# Altium PCB A3010_Adelaide_Keyboard.pcbdoc
Units mm, origin at the board's own origin, x right, y up, seen from the top; angles counter-clockwise.
Board outline 57.91 x 84.45 mm, 4 copper layers (TopLayer, GND, VCC, BottomLayer), stack 1.659 mm thick; 35 components, 70 nets, 249 pads, 0 vias.
Unrouted connection lines stored in the file: 103.
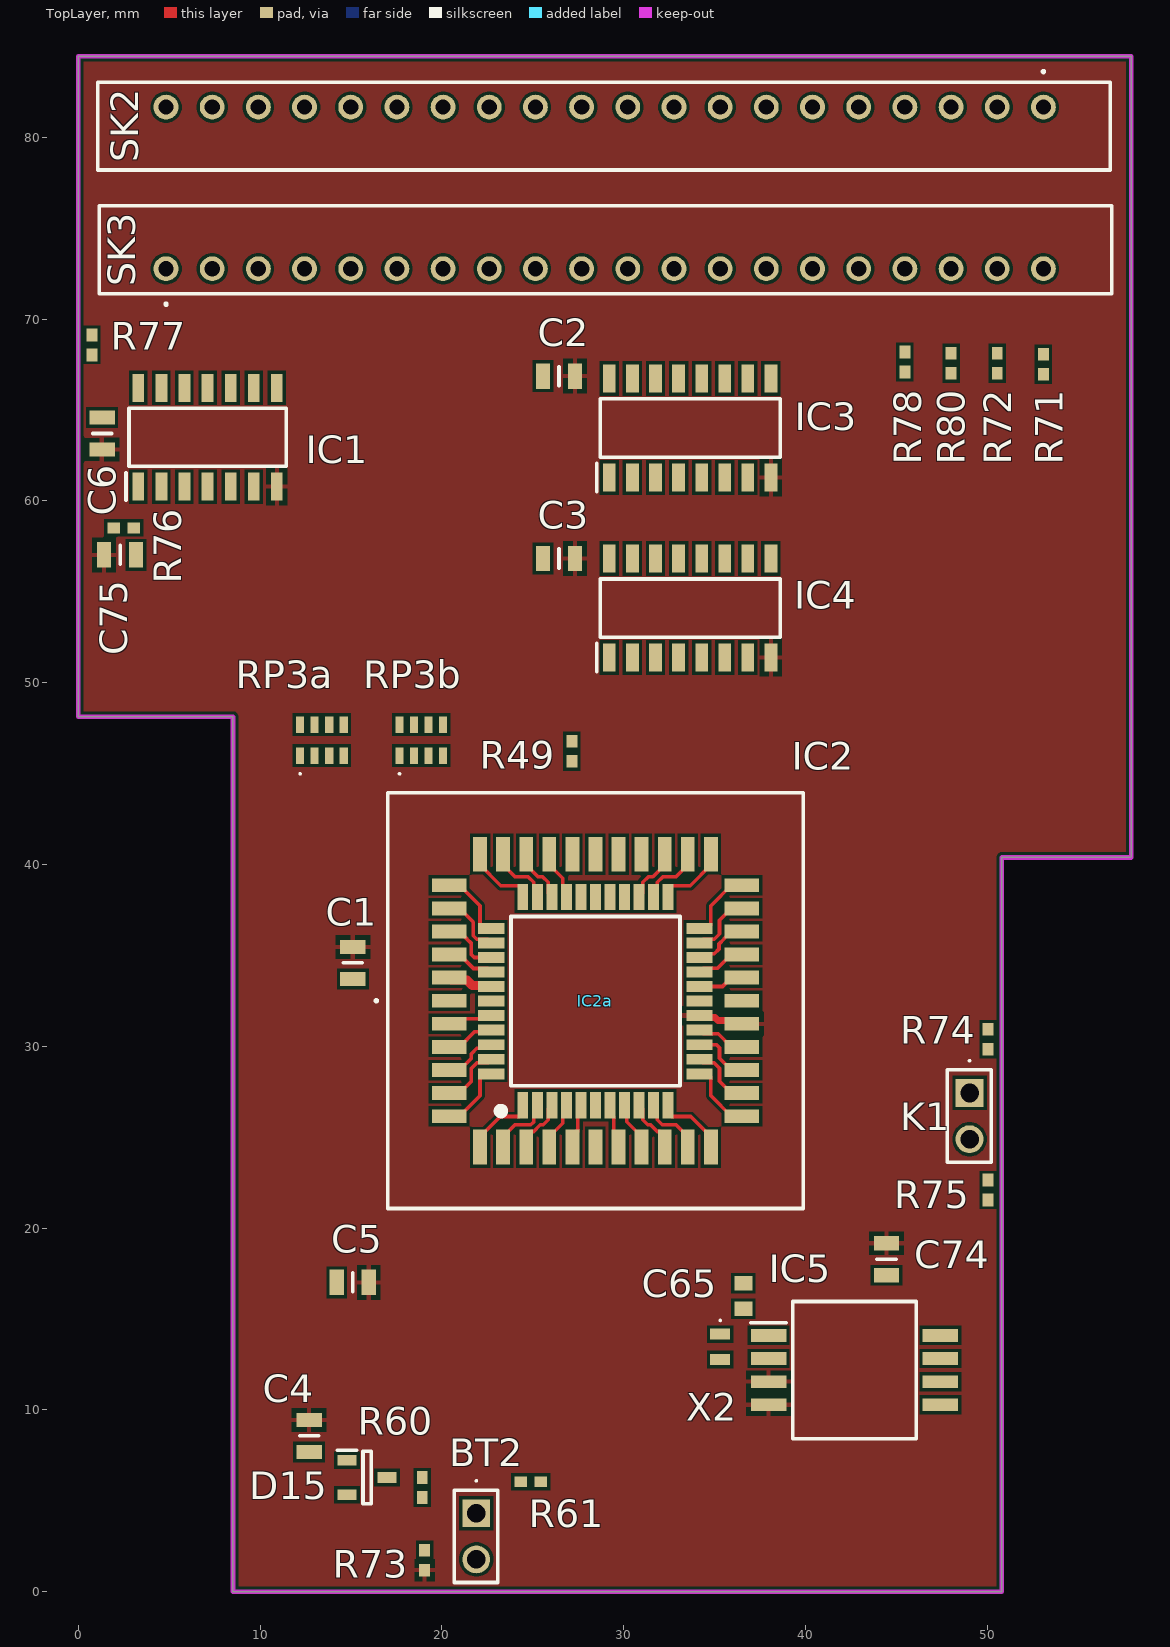
[diagram p0: TopLayer view]
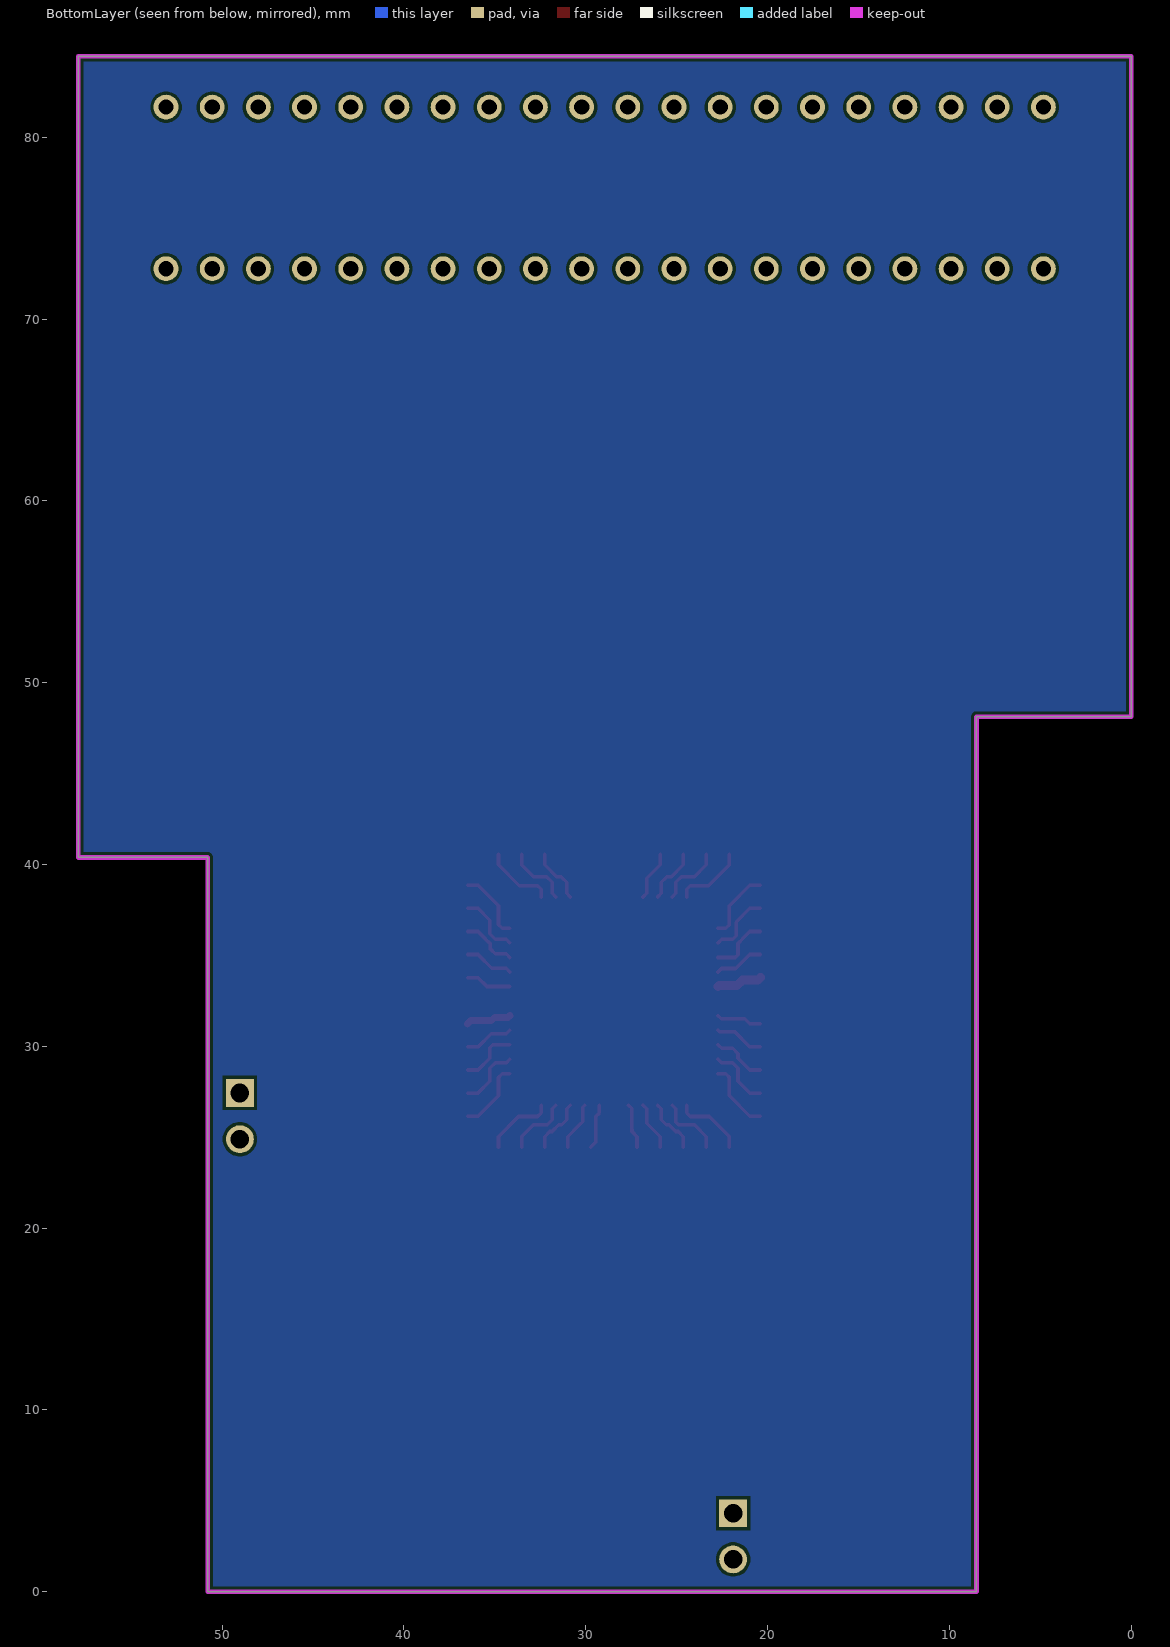
[diagram p1: BottomLayer view, seen from below]
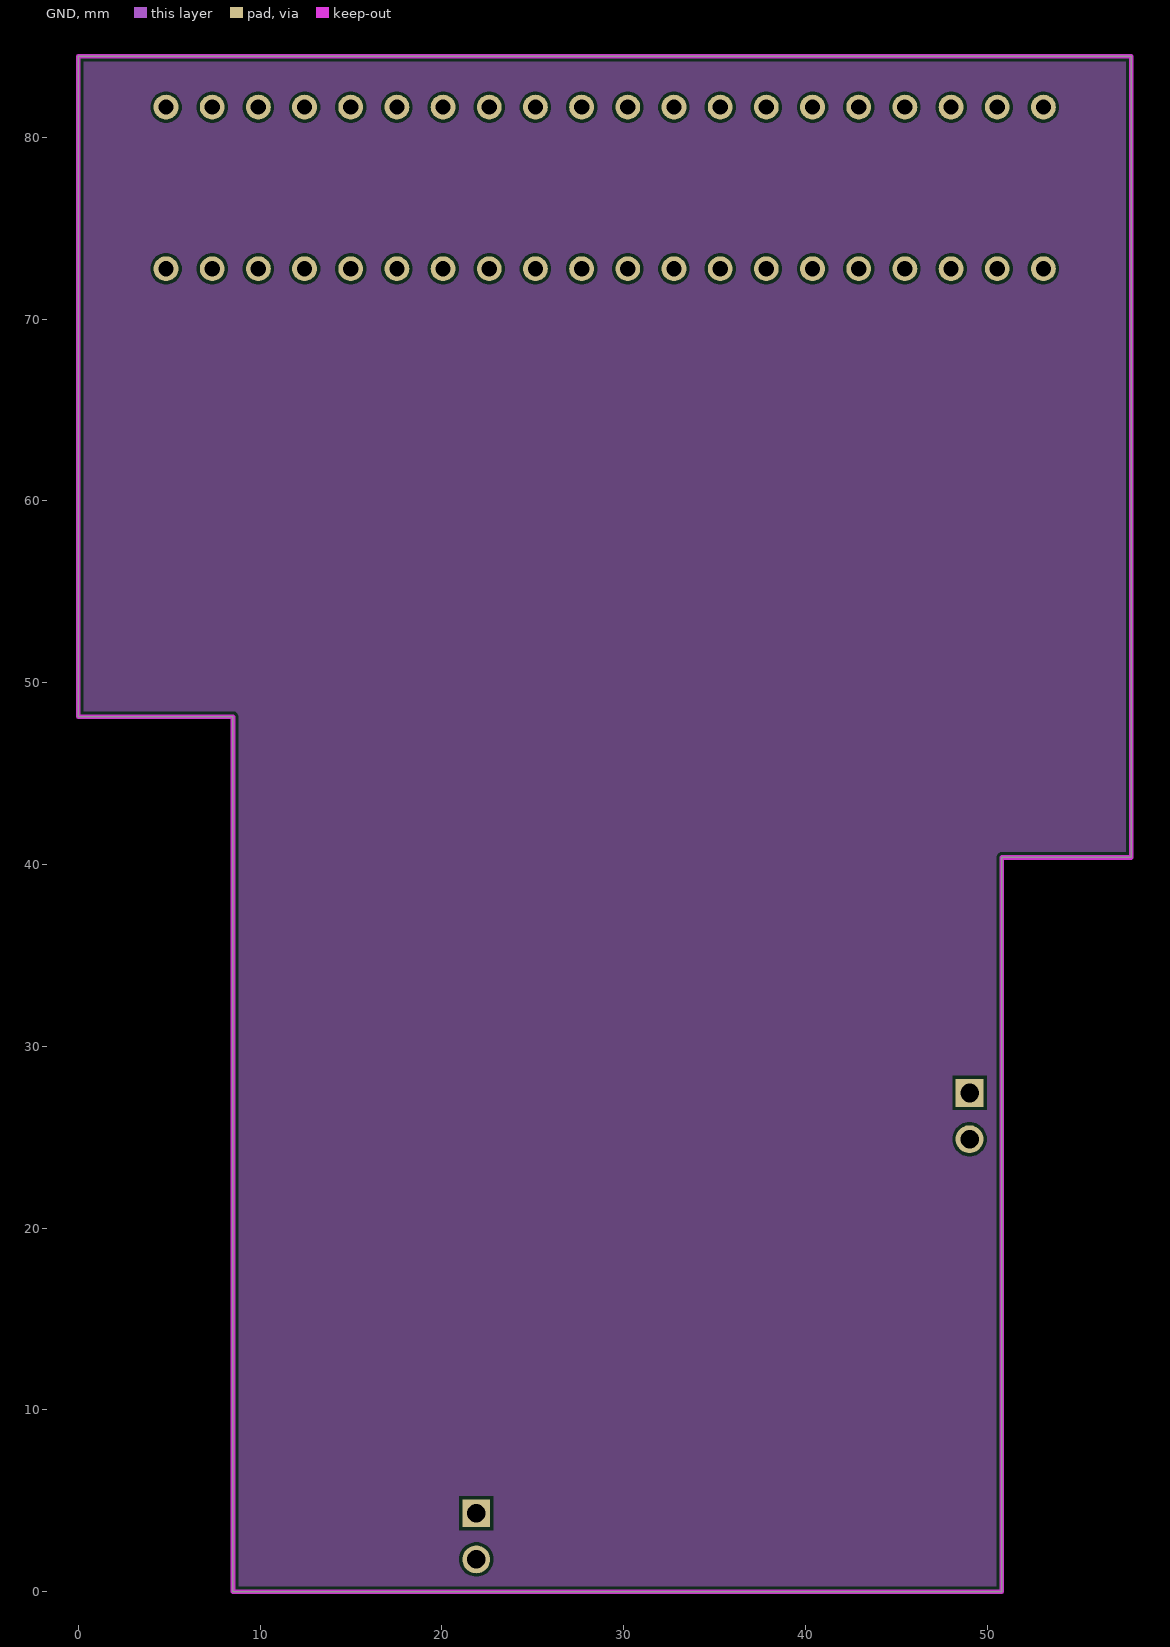
[diagram p2: GND]
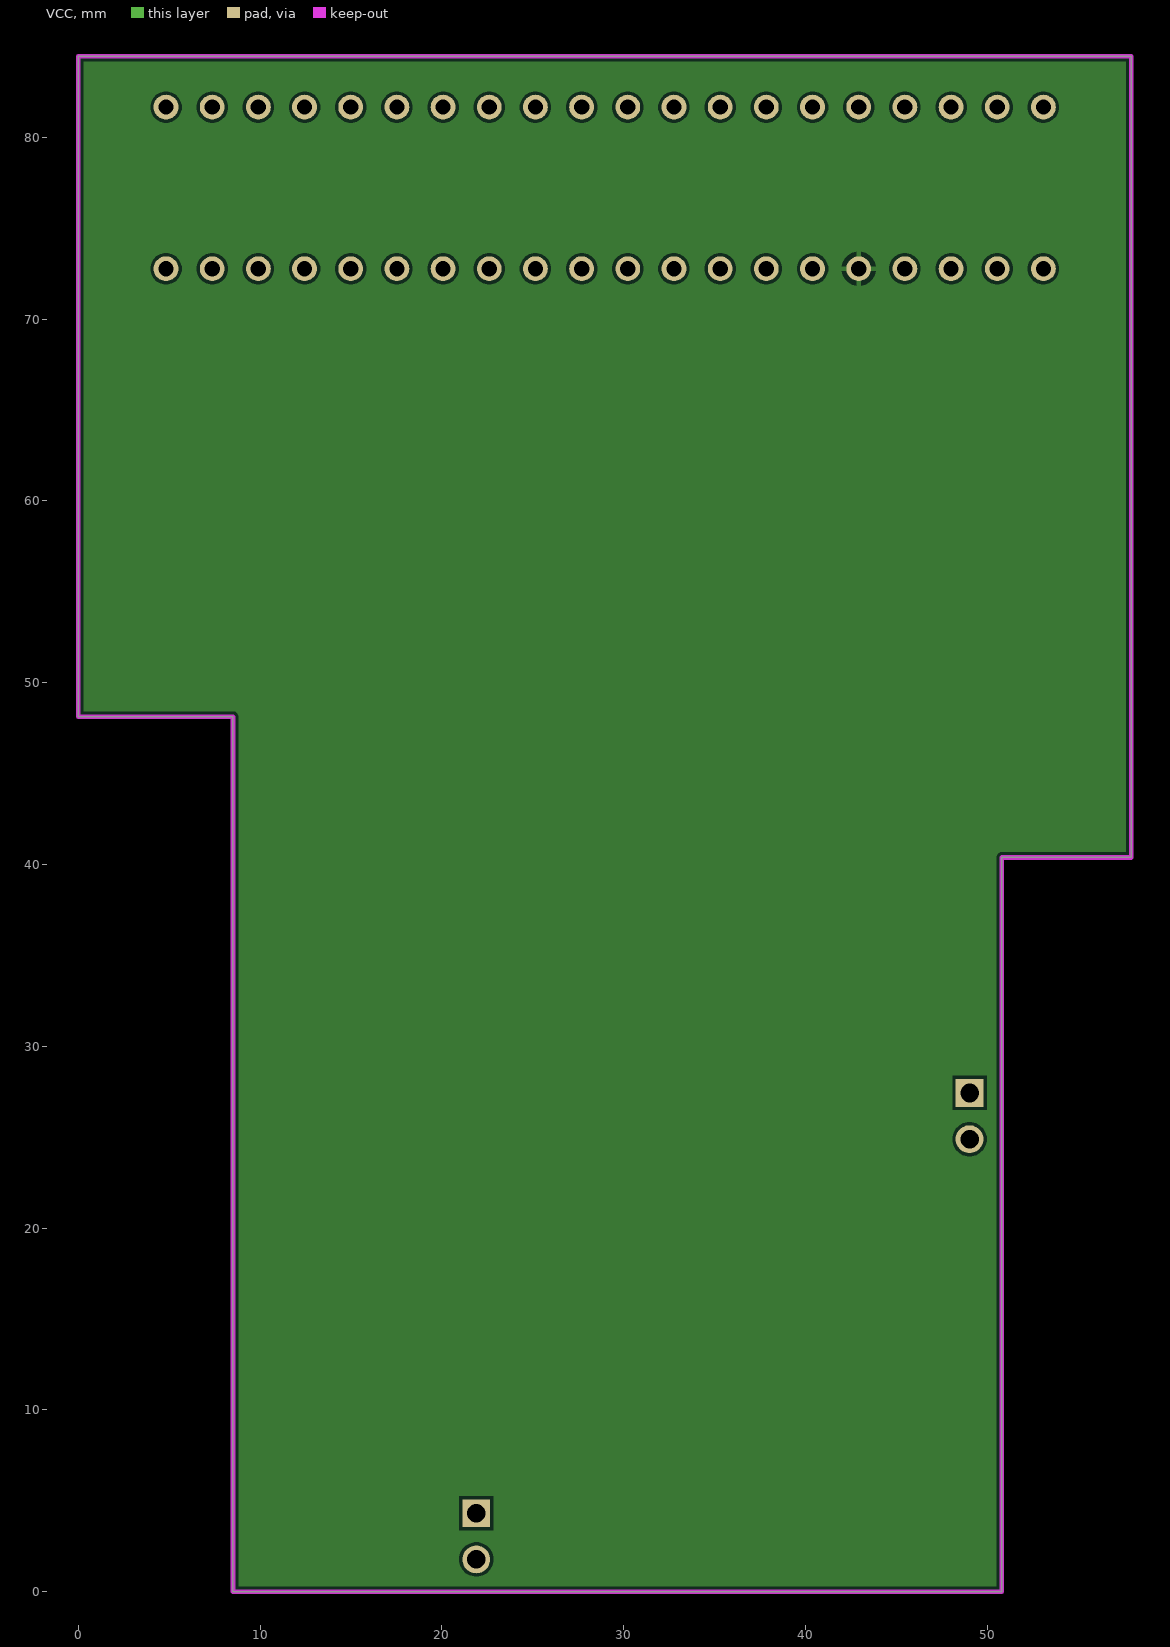
[diagram p3: VCC]

## Layer stack, top to bottom
TopSolder: solder mask 0.01, Solder Resist, Dk 3.5
TopLayer: signal copper 0.036
Dielectric 1: prepreg 0.2083, PP-022, Dk 4.5
GND: signal copper 0.035
Dielectric 2: core 1.1, Core-043, Dk 4.3
VCC: signal copper 0.035
Dielectric 3: prepreg 0.2083, PP-022, Dk 4.5
BottomLayer: signal copper 0.036
BottomSolder: solder mask 0.01, Solder Resist, Dk 3.5

## Board outline
50.8,0 8.509,0 8.509,48.133 0,48.133 0,84.455 57.912,84.455 57.912,40.386 50.8,40.386

## Design rules (kind name [scope] priority, off if disabled: settings)
BoardOutlineClearance [All] p1: gap=0.3 ignorepadtopadclearanceinfootprint=FALSE
Clearance [All] p1: gap=0.17 ignorepadtopadclearanceinfootprint=FALSE except(0.3: Via-Via; 0.5: Via-Hole)
ComponentClearance ComponentClearance_Z2_Z3 [(InComponent('Z2') OR InComponent('Z3')) vs InComponent('No Component')] p1: gap=0 collisioncheckmode=3 verticalgap=0 showdistances=FALSE
ComponentClearance ComponentClearance_U4_J104 [All] p2: gap=0 collisioncheckmode=3 verticalgap=0 showdistances=FALSE
ComponentClearance ComponentClearance_J3_J4 [InComponent('J3') vs InComponent('J4')] p3: gap=0 collisioncheckmode=3 verticalgap=0 showdistances=FALSE
ComponentClearance ComponentClearance_J103_J104 [InComponent('J103') vs InComponent('J104')] p4: gap=0 collisioncheckmode=3 verticalgap=0 showdistances=FALSE
ComponentClearance [All] p5: gap=0.254 collisioncheckmode=3 verticalgap=0.254 showdistances=FALSE
DiffPairsRouting [InDifferentialPairClass('All Differential Pairs')] p1: maxlimit=0.254 minlimit=0.114 mostfreqgap=0.17 toplayer_mingap=0.17 toplayer_minwidth=0.2 toplayer_maxwidth=0.381 toplayer_prefwidth=0.237 midlayer1_prefgap=0.115 midlayer1_minwidth=0.381 midlayer1_maxwidth=0.381 midlayer1_prefwidth=0.381 midlayer2_prefgap=0.115 midlayer2_minwidth=0.381 midlayer2_maxwidth=0.381 midlayer2_prefwidth=0.381 bottomlayer_mingap=0.17 bottomlayer_minwidth=0.2 bottomlayer_maxwidth=0.381 bottomlayer_prefwidth=0.237 maxuncoupledlength=12.7
FabricationTestPointUsage TestPointUsage [All] p1: valid=0 allowmultiple=FALSE
FabricationTestpoint Testpoint [All] p1: side=3 testpointundercomponent=TRUE minsize=1.016 maxsize=2.54 preferedsize=1.524 minholesize=0.508 maxholesize=1.016 preferedholesize=0.813 testpointgrid=0.025 allowsidetop=TRUE allowsidebottom=TRUE usegrid=TRUE gridtolerance=0
HoleSize [All] p1: absolutevalues=TRUE maxlimit=5 minlimit=0.4 maxpercent=80.000 minpercent=20.000
HoleToHoleClearance [All] p1: gap=0.25 allowstackedmicrovias=FALSE
MinimumSolderMaskSliver [All] p1: minsoldermaskwidth=0.02
PlaneClearance [All] p1: clearance=0.2
PlaneConnect [All] p1: pad.planeconnectstyle=Relief pad.reliefexpansion=0.508 pad.reliefentries=4 pad.reliefconductorwidth=0.254 pad.reliefairgap=0.254 via.planeconnectstyle=Direct via.reliefexpansion=0.508 via.reliefentries=4 via.reliefconductorwidth=0.254 via.reliefairgap=0.254
PolygonConnect [All] p1: thpad.connectstyle=Relief thpad.reliefconductorwidth=0.254 thpad.reliefentries=4 thpad.polygonreliefangle="90 Angle" thpad.airgapwidth=0.254 smdpad.connectstyle=Relief smdpad.reliefconductorwidth=0.254 smdpad.reliefentries=4 smdpad.polygonreliefangle="90 Angle" smdpad.airgapwidth=0.254 via.connectstyle=Direct via.reliefconductorwidth=0.254 via.reliefentries=4 via.polygonreliefangle="90 Angle" via.airgapwidth=0.254
RoutingVias [All] p1: holewidth=0.4 width=0.8 viastyle="Through Hole" minholewidth=0.4 minwidth=0.6 maxholewidth=0.4 maxwidth=0.8
SilkToSilkClearance [All] p1: silktosilkclearance=0.1
SilkToSolderMaskClearance SilkscreenOverComponentPads [IsPad] p1: minsilkscreentomaskgap=0.1 clearancetoexposedcopper=TRUE
SolderMaskExpansion [All] p1: expansion=0.075 istentingtop=FALSE
SupplyNets "Schematic Supply Nets_1" [InNet('VCC')] p1: voltage=0.000
SupplyNets "Schematic Supply Nets" [InNet('GND')] p2: voltage=0.000
Width [All] p1: maxlimit=5 minlimit=0.15 preferedwidth=0.2
19 further rules are at their usual default settings.

## Components (designator, comment, footprint, x,y, rotation, side; value= is the part's Value field where it differs from the comment)
BT2 "2pin hdr" 10129378902002BLF 21.892,4.318 r270 top
C1 "100nF" 0805cap 15.1,34.587 r90 top
C2 "100nF" 0805cap 26.444,66.86 r0 top
C3 "100nF" 0805cap 26.444,56.827 r0 top
C4 "100nF" 0805cap 12.7,8.573 r90 top
C5 "100nF" 0805cap 15.1,17.018 r0 top
C6 "100nF" 0805cap 1.312,63.709 r270 top
C65 "12pF" CAPC1608X90N 36.576,16.267 r90 top
C74 "4.7uF" 0805cap 44.45,18.288 r90 top
C75 "4.7uF" 0805cap 2.304,57.033 r0 top
D15 "BAS16,235" SOT95P230X110-3N 15.887,6.283 r0 top
IC1 "74HCT14" SOIC127P600X175-14N 7.112,63.5 r90 top
IC2 "69802-144LF" 69802144LF 28.448,32.506 r90 top
IC2a "AT89C51RD2-RLTIM" QFP80P1200X1200X160-44N 28.448,32.487 r90 top
IC3 "SN74LS145D" SOIC127P600X175-16N 33.653,64.008 r90 top
IC4 "SN74LS145D" SOIC127P600X175-16N 33.653,54.102 r90 top
IC5 "PCF8583T" SOIC127P1032X265-8N 42.693,12.192 r0 top
K1 "2pin hdr" 10129378902002BLF 49.022,27.432 r270 top
R49 "10K" RESC1005X40N 27.148,46.228 r90 top
R60 "180R" RESC1005X40N 18.922,5.733 r90 top
R61 "47R" RESC1005X40N 24.892,6.048 r180 top
R71 "330R" RESC1005X40N 53.086,67.51 r90 top
R72 "330R" RESC1005X40N 50.546,67.564 r90 top
R73 "180R" RESC1005X40N 19.05,1.736 r90 top
R74 "4K7" RESC1005X40N 50.038,30.391 r90 top
R75 "4K7" RESC1005X40N 50.038,22.098 r270 top
R76 "10K" RESC1005X40N 2.504,58.515 r180 top
R77 "220R" RESC1005X40N 0.762,68.58 r270 top
R78 "270R" RESC1005X40N 45.466,67.639 r90 top
R80 "270R" RESC1005X40N 48.006,67.564 r90 top
RP3a "TC164-JR-0747KL" TC164JR0747KL 13.401,46.838 r0 top
RP3b "TC164-JR-0747KL" TC164JR0747KL 18.869,46.838 r0 top
SK2 "7-520355-0" 75203550 53.086,81.661 r180 top
SK3 "7-520355-0" 75203550 4.826,72.771 r0 top
X2 "830050789" 830050789 35.31,13.472 r270 top

## Footprints (in the part's own frame and the unit in brackets; to place one, negate y for a bottom-side part, rotate by r counter-clockwise, add the part's x,y. Pads: shape width x height; smd on the part's side, far side on the other; paste and mask are expansions set on the pad)
0805cap [mm]
  rect 0.78x1.39 smd: 1(-0.88,0) 2(0.88,0)
  silkscreen extent 0,-0.53 0,0.53, body extent -1,-0.63 1,0.63, height 0.6
69802144LF [mm]
  rect 0.76x1.91 smd: 1(0,8.05) 2(-1.27,8.05) 3(-2.54,8.05) 4(-3.81,8.05) 5(-5.08,8.05) 6(-6.35,8.05) 18(-6.35,-8.05) 19(-5.08,-8.05) 20(-3.81,-8.05) 21(-2.54,-8.05) 22(-1.27,-8.05) 23(0,-8.05) 24(1.27,-8.05) 25(2.54,-8.05) 26(3.81,-8.05) 27(5.08,-8.05) 28(6.35,-8.05) 40(6.35,8.05) 41(5.08,8.05) 42(3.81,8.05) 43(2.54,8.05) 44(1.27,8.05)
  rect 1.91x0.76 smd: 7(-8.05,6.35) 8(-8.05,5.08) 9(-8.05,3.81) 10(-8.05,2.54) 11(-8.05,1.27) 12(-8.05,0) 13(-8.05,-1.27) 14(-8.05,-2.54) 15(-8.05,-3.81) 16(-8.05,-5.08) 17(-8.05,-6.35) 29(8.05,-6.35) 30(8.05,-5.08) 31(8.05,-3.81) 32(8.05,-2.54) 33(8.05,-1.27) 34(8.05,0) 35(8.05,1.27) 36(8.05,2.54) 37(8.05,3.81) 38(8.05,5.08) 39(8.05,6.35)
  silkscreen extent -11.43,-11.43 11.43,12.1, body extent -11.43,-11.43 11.43,11.43, height 4.72
75203550 [mm]
  round 1.365 hole 0.84: 1(0,0) 2(2.54,0) 3(5.08,0) 4(7.62,0) 5(10.16,0) 6(12.7,0) 7(15.24,0) 8(17.78,0) 9(20.32,0) 10(22.86,0) 11(25.4,0) 12(27.94,0) 13(30.48,0) 14(33.02,0) 15(35.56,0) 16(38.1,0) 17(40.64,0) 18(43.18,0) 19(45.72,0) 20(48.26,0)
  silkscreen extent -3.68,-2 52.02,3.46, body extent -3.49,-1.15 51.83,3.24, height 7.19
830050789 [mm]
  rect 0.6x1.1 smd: 1(-0.7,0) 2(0.7,0)
  silkscreen extent -1.5,-0.05 -1.4,0.05, body extent -1,-0.6 1,0.6, height 0.55
10129378902002BLF [mm]
  rect 1.53x1.53 hole 1.02: 1(0,0)
  round 1.53 hole 1.02: 2(2.54,0)
  silkscreen extent -1.83,-1.22 3.81,1.19, body extent -1.27,-1.2 3.81,1.2, height 8.43
CAPC1608X90N [mm]
  rect 0.78x0.99 smd: 1(-0.7,0) 2(0.7,0)
  body extent -0.8,-0.41 0.8,0.41, height 0.9
QFP80P1200X1200X160-44N [mm]
  rect 1.45x0.6 smd: 1(-5.725,4) 2(-5.725,3.2) 3(-5.725,2.4) 4(-5.725,1.6) 5(-5.725,0.8) 6(-5.725,0) 7(-5.725,-0.8) 8(-5.725,-1.6) 9(-5.725,-2.4) 10(-5.725,-3.2) 11(-5.725,-4) 23(5.725,-4) 24(5.725,-3.2) 25(5.725,-2.4) 26(5.725,-1.6) 27(5.725,-0.8) 28(5.725,0) 29(5.725,0.8) 30(5.725,1.6) 31(5.725,2.4) 32(5.725,3.2) 33(5.725,4)
  rect 0.6x1.45 smd: 12(-4,-5.725) 13(-3.2,-5.725) 14(-2.4,-5.725) 15(-1.6,-5.725) 16(-0.8,-5.725) 17(0,-5.725) 18(0.8,-5.725) 19(1.6,-5.725) 20(2.4,-5.725) 21(3.2,-5.725) 22(4,-5.725) 34(4,5.725) 35(3.2,5.725) 36(2.4,5.725) 37(1.6,5.725) 38(0.8,5.725) 39(0,5.725) 40(-0.8,5.725) 41(-1.6,5.725) 42(-2.4,5.725) 43(-3.2,5.725) 44(-4,5.725)
  silkscreen extent -6.25,-4.65 4.65,5.4, body extent -6,-6 6,6, height 1.6
RESC1005X40N [mm]
  rect 0.7x0.6 smd: 1(-0.55,0) 2(0.55,0)
  body extent -0.5,-0.25 0.5,0.25, height 0.4
SOIC127P600X175-14N [mm]
  rect 1.525x0.65 smd: 1(-2.712,3.81) 2(-2.712,2.54) 3(-2.712,1.27) 4(-2.712,0) 5(-2.712,-1.27) 6(-2.712,-2.54) 7(-2.712,-3.81) 8(2.712,-3.81) 9(2.712,-2.54) 10(2.712,-1.27) 11(2.712,0) 12(2.712,1.27) 13(2.712,2.54) 14(2.712,3.81)
  silkscreen extent -3.47,-4.33 1.6,4.48, body extent -3,-4.33 3,4.33, height 1.75
SOIC127P600X175-16N [mm]
  rect 1.55x0.7 smd: 1(-2.725,4.445) 2(-2.725,3.175) 3(-2.725,1.905) 4(-2.725,0.635) 5(-2.725,-0.635) 6(-2.725,-1.905) 7(-2.725,-3.175) 8(-2.725,-4.445) 9(2.725,-4.445) 10(2.725,-3.175) 11(2.725,-1.905) 12(2.725,-0.635) 13(2.725,0.635) 14(2.725,1.905) 15(2.725,3.175) 16(2.725,4.445)
  silkscreen extent -3.5,-4.95 1.6,5.15, body extent -3,-4.95 3,4.95, height 1.75
SOIC127P1032X265-8N [mm]
  rect 1.95x0.7 smd: 1(-4.725,1.905) 2(-4.725,0.635) 3(-4.725,-0.635) 4(-4.725,-1.905) 5(4.725,-1.905) 6(4.725,-0.635) 7(4.725,0.635) 8(4.725,1.905)
  silkscreen extent -5.7,-3.77 3.4,3.77, body extent -5.16,-3.77 5.16,3.77, height 2.65
SOT95P230X110-3N [mm]
  rect 1.05x0.6 smd: 1(-1.1,0.95) 2(-1.1,-0.95) 3(1.1,0)
  silkscreen extent -1.63,-1.45 0.23,1.5, body extent -1.2,-1.45 1.2,1.45, height 0.95
TC164JR0747KL [mm]
  rect 0.45x0.9 smd: 1(-1.2,-0.85) 2(-0.4,-0.85) 3(0.4,-0.85) 4(1.2,-0.85) 5(1.2,0.85) 6(0.4,0.85) 7(-0.4,0.85) 8(-1.2,0.85)
  silkscreen extent -1.25,-1.9 -1.15,-1.8, body extent -1.6,-1.25 1.6,1.25, height 0.8

## Part data
BT2 K1: library part 10129378-902002BLF, "Connector", Manufacturer_Name="Amphenol Communications Solutions", Datasheet Link=https://cdn.amphenol-cs.com/media/wysiwyg/files/drawing/10129378.pdf, Height=8.58mm, Manufacturer_Part_Number=10129378-902002BLF
C1 C2 C3 C4 C5 C6: library part 100nF0805, "Capacitor", Arrow Part Number=C2012X7R1H104K125AM, LCSC Part #=C111492, Manufacturer_Name=TDK, Mouser Part Number=810-C2012X7R1H104KT5, Arrow Price/Stock=https://www.arrow.com/en/products/c2012x7r1h104k125am/tdk, Datasheet Link=https://product.tdk.com/info/en/catalog/datasheets/mlcc_commercial_midvoltage_en.pdf, Height=1.45mm, Manufacturer_Part_Number=C2012X7R1H104K125AM, Mouser Price/Stock=https://www.mouser.com/Search/Refine.aspx?Keyword=810-C2012X7R1H104KT5
C65: library part CL10C120JB8NNNC, "Capacitor", Manufacturer_Name=SAMSUNG, Mouser Part Number=N/A, Arrow Part Number=CL10C120JB8NNNC, Arrow Price/Stock=https://www.arrow.com/en/products/cl10c120jb8nnnc/samsung-electro-mechanics, Datasheet Link=http://uk.rs-online.com/web/p/products/7664995, Height=0.9mm, Manufacturer_Part_Number=CL10C120JB8NNNC, Mouser Price/Stock=https://www.mouser.co.uk/ProductDetail/Samsung-Electro-Mechanics/CL10C120JB8NNNC?qs=349EhDEZ59q%252BsXw6lhqGjQ%3D%3D
C74 C75: library part 4u7F0805, "Capacitor", ManuPart=KGM21AR51C475MU
D15: "Diode", Manufacturer_Name=Nexperia, Mouser Part Number=771-BAS16235, Arrow Part Number=BAS16,235, Arrow Price/Stock=https://www.arrow.com/en/products/bas16235/nexperia?utm_currency=USD&region=europe, Datasheet Link=http://www.nxp.com/documents/data_sheet/BAS16_SER.pdf, Height=1.1mm, Manufacturer_Part_Number=BAS16,235, Mouser Price/Stock=https://www.mouser.co.uk/ProductDetail/Nexperia/BAS16235?qs=me8TqzrmIYXqqOYz5furtQ%3D%3D
IC1: library part 74HCT14D_BJ_, "Integrated Circuit", Arrow Part Number=74HCT14D(BJ), Manufacturer_Name=Toshiba, Mouser Part Number=757-74HCT14DBJ, Arrow Price/Stock=https://www.arrow.com/en/products/74hct14d-bj/toshiba?region=nac, Datasheet Link=https://www.arrow.com/en/products/74hct14d-bj/toshiba?region=nac, Height=1.75mm, Manufacturer_Part_Number=74HCT14D(BJ), Mouser Price/Stock=https://www.mouser.co.uk/ProductDetail/Toshiba/74HCT14DBJ?qs=lQAVKuKFhkJBaNJWtuyKQw%3D%3D
IC2: "Connector", Manufacturer_Name="Amphenol Communications Solutions", Mouser Part Number=649-69802-144LF, Arrow Part Number=69802-144LF, Arrow Price/Stock=https://www.arrow.com/en/products/69802-144lf/amphenol-fci?region=europe, Datasheet Link=https://cdn.amphenol-cs.com/media/wysiwyg/files/documentation/datasheet/boardwiretoboard/bwtb_ic_plcc.pdf, Height=4.62mm, Manufacturer_Part_Number=69802-144LF, Mouser Price/Stock=https://www.mouser.co.uk/ProductDetail/Amphenol-FCI/69802-144LF?qs=kJUkXSjFC7wFmVr2EYK5aQ%3D%3D
IC2a: "Integrated Circuit", Manufacturer_Name=Microchip, Mouser Part Number=N/A, Datasheet Link=http://www.mouser.com/datasheet/2/268/doc4257-1180836.pdf, Height=1.6mm, Manufacturer_Part_Number=AT89C51RD2-RLTIM, Mouser Price/Stock=https://www.mouser.com/Search/Refine.aspx?Keyword=N%2FA
IC3 IC4: "Integrated Circuit", Manufacturer_Name="Texas Instruments", Mouser Part Number=595-SN74LS145D, Arrow Part Number=SN74LS145D, Arrow Price/Stock=https://www.arrow.com/en/products/sn74ls145d/texas-instruments?region=nac, Datasheet Link=http://www.ti.com/lit/gpn/SN74LS145, Height=1.75mm, Manufacturer_Part_Number=SN74LS145D, Mouser Price/Stock=https://www.mouser.co.uk/ProductDetail/Texas-Instruments/SN74LS145D?qs=OorDGPQ79Eplw%252BzdCZy7wQ%3D%3D
IC5: library part PCF8583T_5,518, "Integrated Circuit", Arrow Part Number=PCF8583T/5,518, Manufacturer_Name=NXP, Mouser Part Number=771-PCF8583TD-T, Arrow Price/Stock=https://www.arrow.com/en/products/pcf8583t5518/nxp-semiconductors?region=nac, Datasheet Link=http://www.nxp.com/docs/en/data-sheet/PCF8583.pdf, Height=2.65mm, Manufacturer_Part_Number=PCF8583T/5,518, Mouser Price/Stock=https://www.mouser.co.uk/ProductDetail/NXP-Semiconductors/PCF8583T-5518?qs=LOCUfHb8d9vGQfXHemzR2A%3D%3D
R49 R76: library part CRCW040210K0FKEDHP, "Resistor", LCSC Part #=C71617, Manufacturer_Name=Vishay, Mouser Part Number=71-CRCW040210K0FKEDH, Arrow Part Number=CRCW040210K0FKEDHP, Arrow Price/Stock=https://www.arrow.com/en/products/crcw040210k0fkedhp/vishay?region=nac, Datasheet Link=http://www.vishay.com/docs/20035/dcrcwe3.pdf, Height=0.4mm, Manufacturer_Part_Number=CRCW040210K0FKEDHP, Mouser Price/Stock=https://www.mouser.co.uk/ProductDetail/Vishay-Dale/CRCW040210K0FKEDHP?qs=FlFvgi4rxBxmIiaeyFjrkA%3D%3D
R60 R73: library part RC0402JR-07_180RL, "Resistor", Arrow Part Number="RC0402JR-07 180RL", Manufacturer_Name=KEMET, Arrow Price/Stock=https://www.arrow.com/en/products/rc0402jr-07180rl/yageo, Datasheet Link=https://www.arrow.com/en/products/rc0402jr-07180rl/yageo, Height=0.4mm, Manufacturer_Part_Number="RC0402JR-07 180RL"
R61: library part RC0402FR-07_47RL, "Resistor", Arrow Part Number="RC0402FR-07 47RL", Manufacturer_Name=KEMET, Arrow Price/Stock=https://www.arrow.com/en/products/rc0402fr-0747rl/yageo, Datasheet Link=http://www.yageo.com/documents/recent/PYu-RC0402_51_RoHS_L_6_r.pdf, Height=0.4mm, Manufacturer_Part_Number="RC0402FR-07 47RL"
R71 R72: library part RC0402FR-07330RL, "Resistor", Manufacturer_Name=KEMET, Mouser Part Number=603-RC0402FR-07330RL, Arrow Part Number=RC0402FR-07330RL, Arrow Price/Stock=https://www.arrow.com/en/products/rc0402fr-07330rl/yageo, Datasheet Link=http://www.yageo.com/documents/recent/PYu-RC0402_51_RoHS_L_6_r.pdf, Height=0.4mm, Manufacturer_Part_Number=RC0402FR-07330RL, Mouser Price/Stock=https://www.mouser.co.uk/ProductDetail/Yageo/RC0402FR-07330RL?qs=V1yeUXFNrkngRWHRQxns%2Fg%3D%3D
R74 R75: library part RC0402FR-07_4K7L, "Resistor", Arrow Part Number="RC0402FR-07 4K7L", Manufacturer_Name=KEMET, Arrow Price/Stock=https://www.arrow.com/en/products/rc0402fr-074k7l/yageo?region=nac, Datasheet Link=http://www.yageo.com/documents/recent/PYu-RC0402_51_RoHS_L_6_r.pdf, Height=0.4mm, Manufacturer_Part_Number="RC0402FR-07 4K7L"
R77: library part RC0402FR-07220RL, "Resistor", Manufacturer_Name=KEMET, Mouser Part Number=603-RC0402FR-07220RL, Arrow Part Number=RC0402FR-07220RL, Arrow Price/Stock=https://www.arrow.com/en/products/rc0402fr-07220rl/yageo?region=nac, Datasheet Link=https://datasheet.datasheetarchive.com/originals/distributors/Datasheets_SAMA/902f9e387b938f871d31120f5fc1d65e.pdf, Height=0.4mm, Manufacturer_Part_Number=RC0402FR-07220RL, Mouser Price/Stock=https://www.mouser.co.uk/ProductDetail/YAGEO/RC0402FR-07220RL?qs=UOUeRUa%252B8Wkw9iNOZEwgHw%3D%3D
R78 R80: library part RC0402FR-07270RL, "Resistor", Manufacturer_Name=KEMET, Mouser Part Number=603-RC0402FR-07270RL, Arrow Part Number=RC0402FR-07270RL, Arrow Price/Stock=https://www.arrow.com/en/products/rc0402fr-07270rl/yageo, Datasheet Link=http://www.yageo.com/documents/recent/PYu-RC0402_51_RoHS_L_6_r.pdf, Height=0.4mm, Manufacturer_Part_Number=RC0402FR-07270RL, Mouser Price/Stock=https://www.mouser.co.uk/ProductDetail/Yageo/RC0402FR-07270RL?qs=beCmh%2FXShNd6fsxAzpS%2Fyw%3D%3D
RP3a RP3b: "Resistor Network", Manufacturer_Name=YAGEO, Datasheet Link=https://www.yageo.com/upload/media/product/productsearch/datasheet/rchip/PYu-YC_TC_group_51_RoHS_L_9.pdf, Height=0.7mm, Manufacturer_Part_Number=TC164-JR-0747KL
SK2 SK3: "Connector", Manufacturer_Name="TE Connectivity", Mouser Part Number=571-7-520355-0, Datasheet Link=https://www.te.com/commerce/DocumentDelivery/DDEController?Action=srchrtrv&DocNm=520355&DocType=Customer+Drawing&DocLang=English&PartCntxt=7-520355-0&DocFormat=pdf, Height=7.31mm, Manufacturer_Part_Number=7-520355-0, Mouser Price/Stock=https://www.mouser.co.uk/ProductDetail/TE-Connectivity/7-520355-0?qs=g4ENe7ujGXUMgeVWxz5Gqg%3D%3D
X2: "Crystal or Oscillator", Manufacturer_Name="Wurth Elektronik", Mouser Part Number=710-830050789, Datasheet Link=https://www.we-online.com/catalog/datasheet/830050789.pdf, Height=0.6mm, Manufacturer_Part_Number=830050789, Mouser Price/Stock=https://www.mouser.co.uk/ProductDetail/Wurth-Elektronik/830050789?qs=2WXlatMagcG%2Fhb4pC63Fuw%3D%3D

## Nets (pads, with @x,y where several pads share a name; then routed paths per layer and width w, separated by ;. In a path a pad name is that pad's centre, name@x,y a point inside that pad or via, vN(x,y) a via of type N, cw(c..) or ccw(c..) an arc to the next point about the centre after c; other vN are vias at no path point)
C0: IC5.5 K1.2 R75.1
C1: IC5.6 K1.1 R74.1
Capsled: R77.1 SK3.1
DRst: IC1.2 IC2.10 IC2a.4 | length 2.7
  TopLayer w0.2: IC2.10 25.908,25.031 26.648,25.771 26.648,26.562 IC2a.4
GND: C1.2 C2.2 C3.2 C4.2 C5.2 C6.2 C74.2 C75.1 IC1.7 IC2.22 IC2a.16 IC3.8 IC4.8 IC5.3 IC5.4 R73.1 | length 2.5
  TopLayer w0.4: IC2a.16 34.273,31.587 35.021,31.587 35.191,31.416 36.318,31.416 IC2.22
Kin: IC2.13 IC2a.7 | length 2.5
  TopLayer w0.2: IC2a.7 29.248,26.337 29.458,26.127 29.458,24.716 IC2.13
Kout: IC2.11 IC2a.5 | length 2.5
  TopLayer w0.2: IC2.11 27.178,25.031 27.458,25.311 27.458,25.412 27.475,25.429 27.475,26.588 IC2a.5
nEA: IC2.35 IC2a.29 R49.1
NetBT2_1: BT2.1 R60.1
NetBT2_2: BT2.2 R73.2
NetC65_1: C65.1 IC5.1 X2.1
NetC65_2: C65.2 C74.1 IC5.8 R61.2
NetC75_2: C75.2 IC1.1 R76.1
NetD15_3: D15.3 R60.2 R61.1
NetIC1_6: IC1.6 R80.2
NetIC1_9: IC1.9 IC1.10 R78.2
NetIC1_12: IC1.12 R77.2
NetIC5_2: IC5.2 X2.2
NetR71_2: R71.2 SK3.20
NetR72_2: R72.2 SK3.19
Nkeycom: IC3.6 SK3.8
Numled: R80.1 SK3.18
P0_0: IC2.43 IC2a.37 RP3a.1 SK2.20 | length 2.7
  TopLayer w0.2: IC2.43 20.973,35.046 21.741,34.278 22.532,34.278 IC2a.37
P0_1: IC2.42 IC2a.36 RP3a.2 SK2.18 | length 3.3
  TopLayer w0.2: IC2.42 20.973,36.316 21.358,35.931 21.358,35.922 21.623,35.657 21.623,35.037 21.773,34.887 IC2a.36
P0_2: IC2.41 IC2a.35 RP3a.3 SK2.17 | length 3.6
  TopLayer w0.2: IC2.41 20.973,37.586 21.728,36.831 21.728,36.075 21.916,35.887 22.523,35.887 IC2a.35
P0_3: IC2.40 IC2a.34 RP3a.4 SK2.16 | length 3.9
  TopLayer w0.2: IC2.40 20.973,38.856 22.098,37.731 22.098,36.687 22.298,36.487 IC2a.34
P0_4: IC2.39 IC2a.33 RP3b.1 SK2.15 | length 3.9
  TopLayer w0.2: IC2.39 22.098,39.981 23.243,38.837 24.248,38.837 24.448,38.637 IC2a.33
P0_5: IC2.38 IC2a.32 RP3b.2 SK2.12 | length 3.5
  TopLayer w0.2: IC2.38 23.368,39.981 24.018,39.331 24.735,39.331 25.048,39.018 25.048,38.412 IC2a.32
P0_6: IC2.37 IC2a.31 RP3b.3 SK2.10 | length 3.1
  TopLayer w0.2: IC2.37 24.638,39.981 25.288,39.331 25.535,39.331 25.848,39.018 25.848,38.412 IC2a.31
P0_7: IC2.36 IC2a.30 RP3b.4 SK2.9 | length 2.7
  TopLayer w0.2: IC2.36 25.908,39.981 26.648,39.241 26.648,38.412 IC2a.30
P1_0: IC2.2 IC2a.40 IC4.10 SK2.19 | length 2.5
  TopLayer w0.2: IC2.2 20.973,31.236 21.253,31.516 21.37,31.516 22.553,31.517 IC2a.40
P1_1: IC2.3 IC2a.41 SK2.14 | length 2.7
  TopLayer w0.2: IC2.3 20.973,29.966 21.815,30.809 22.645,30.809 IC2a.41
P1_2: IC2.4 IC2a.42 SK2.13 | length 3
  TopLayer w0.2: IC2.4 20.973,28.696 21.623,29.346 21.623,29.593 21.916,29.887 22.523,29.887 IC2a.42
P1_3: IC2.5 IC2a.43 SK2.11 | length 3.5
  TopLayer w0.2: IC2.5 20.973,27.426 21.623,28.076 21.623,28.793 21.916,29.087 22.523,29.087 IC2a.43
P1_4: IC2.6 IC2a.44 SK2.8 | length 3.9
  TopLayer w0.2: IC2.6 20.973,26.156 22.098,27.281 22.098,28.287 22.298,28.487 IC2a.44
P1_5: IC2.7 IC2a.1 SK2.7 | length 3.9
  TopLayer w0.2: IC2.7 22.098,25.031 23.203,26.137 24.248,26.137 24.448,26.337 IC2a.1
P1_6: IC2.8 IC2a.2 SK2.6 | length 3.6
  TopLayer w0.2: IC2.8 23.368,25.031 24.018,25.681 24.893,25.681 25.048,25.836 25.048,26.562 IC2a.2
P1_7: IC2.9 IC2a.3 SK2.5 | length 3.1
  TopLayer w0.2: IC2.9 24.638,25.031 24.918,25.311 25.046,25.311 25.416,25.681 25.575,25.681 25.848,25.955 25.848,26.562 IC2a.3
P2_0: IC2.24 IC2a.18 IC3.15 IC4.15 | length 2.5
  TopLayer w0.2: IC2a.18 35.433,33.287 35.923,33.776 IC2.24
P2_1: IC2.25 IC2a.19 IC3.14 IC4.14 | length 2.7
  TopLayer w0.2: IC2a.19 34.373,34.287 35.163,34.287 35.923,35.046 IC2.25
P2_2: IC2.26 IC2a.20 IC3.13 IC4.13 | length 3.1
  TopLayer w0.2: IC2a.20 34.373,35.087 34.98,35.087 35.243,35.349 35.243,35.626 35.538,35.922 35.538,35.931 35.923,36.316 IC2.26
P2_3: IC1.3 IC2.27 IC2a.21 IC4.12 | length 3.6
  TopLayer w0.2: IC2a.21 34.373,35.887 34.98,35.887 35.168,36.075 35.168,36.085 35.273,36.19 35.273,36.936 35.923,37.586 IC2.27
P2_3i: IC1.4 IC3.12
P3_2: IC1.13 IC2.14 IC2a.8 | length 2.7
  TopLayer w0.2: IC2a.8 30.166,26.644 30.166,25.854 30.338,25.681 30.988,25.031 IC2.14
P3_3: IC1.11 IC2.15 IC2a.9 | length 3.1
  TopLayer w0.2: IC2a.9 31.048,26.562 31.048,25.955 31.321,25.681 31.48,25.681 31.85,25.311 31.978,25.311 32.258,25.031 IC2.15
P3_4: IC1.5 IC2.16 IC2a.10 | length 3.5
  TopLayer w0.2: IC2a.10 31.848,26.562 31.848,25.955 32.121,25.681 32.878,25.681 33.528,25.031 IC2.16
Scrollled: R78.1 SK3.17
Sw1: IC2.17 IC2a.11 | length 3.9
  TopLayer w0.2: IC2a.11 32.448,26.337 32.648,26.137 33.693,26.137 34.798,25.031 IC2.17
Sw2: IC2.18 IC2a.12 | length 3.9
  TopLayer w0.2: IC2a.12 34.598,28.487 34.798,28.287 34.798,27.281 35.923,26.156 IC2.18
Sw3: IC2.19 IC2a.13 | length 3.5
  TopLayer w0.2: IC2a.13 34.373,29.087 34.98,29.087 35.273,28.793 35.273,28.076 35.923,27.426 IC2.19
VCC: C1.1 C2.1 C3.1 C4.1 C5.1 C6.1 D15.1 IC1.14 IC2.44 IC2a.38 IC3.16 IC4.16 R49.2 R71.1 R74.2 R75.2 R76.2 RP3a.5 RP3a.6 RP3a.7 RP3a.8 RP3b.5 RP3b.6 RP3b.7 RP3b.8 SK3.16 | length 2.5
  TopLayer w0.5: IC2.44 20.528,33.646 21.373,33.646 21.685,33.334 22.675,33.334 IC2a.38
Xd: IC2.29 IC2a.23 | length 3.9
  TopLayer w0.2: IC2a.23 32.448,38.637 32.648,38.837 33.653,38.837 34.798,39.981 IC2.29
Xr: IC2.28 IC2a.22 | length 3.9
  TopLayer w0.2: IC2a.22 34.598,36.487 34.798,36.687 34.798,37.731 35.923,38.856 IC2.28
Xtl1: IC2.21 IC2a.15 | length 2.7
  TopLayer w0.2: IC2a.15 34.37,30.69 35.199,30.69 35.923,29.966 IC2.21
Xtl2: IC2.20 IC2a.14 | length 3.2
  TopLayer w0.2: IC2a.14 35.108,30.087 35.273,29.921 35.273,29.346 35.923,28.696 IC2.20
Y0: IC4.1 SK3.2
Y1: IC4.2 SK3.3
Y2: IC4.3 SK3.4
Y3: IC4.4 SK3.5
Y4: IC4.5 SK3.6
Y5: IC4.6 SK3.7
Y6: IC4.7 SK3.9
Y7: IC4.9 SK3.10
Y8: IC3.1 SK3.11
Y9: IC3.2 SK3.12
Y10: IC3.3 SK3.13
Y11: IC3.4 SK3.14
Y12: IC3.5 SK3.15
Yd: IC2.31 IC2a.25 | length 3.1
  TopLayer w0.2: IC2a.25 31.048,38.412 31.048,39.018 31.361,39.331 31.608,39.331 32.258,39.981 IC2.31
Yr: IC2.30 IC2a.24 | length 3.5
  TopLayer w0.2: IC2a.24 31.848,38.412 31.848,39.018 32.161,39.331 32.878,39.331 33.528,39.981 IC2.30
pads on no net: D15.2 IC1.8 IC2.1 IC2.12 IC2.23 IC2.32 IC2.33 IC2.34 IC2a.6 IC2a.17 IC2a.26 IC2a.27 IC2a.28 IC2a.39 IC3.7 IC3.9 IC3.10 IC3.11 IC4.11 IC5.7 R72.1 SK2.1 SK2.2 SK2.3 SK2.4

## Polygon pours and split planes (outlines as drawn)
GND on GND "NONET_L-01_P-001" (solid, pour order 1): 0,0 58.039,0 58.039,84.455 0,84.455
VCC on VCC "NONET_L-01_P-001" (solid, pour order 2): 0,0 58.039,0 58.039,84.455 0,84.455
GND on TopLayer "NONET_L-01_P-001" (solid, remove dead copper, pour order 0): 0,0 58.039,0 58.039,84.455 0,84.455
GND on BottomLayer "NONET_L-01_P-001" (solid, pour order 3): 0,0 58.039,0 58.039,84.455 0,84.455

## Keep-outs
KeepOutLayer:
  the board outline again, w0.254